# Allegro board XR872ET_REF1_SAMPLE_V1_0-20191008.brd
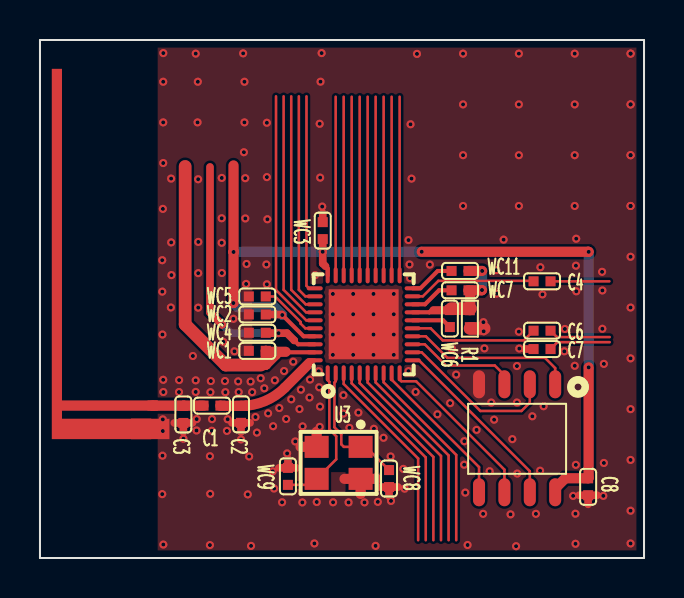
[diagram p0: board, top side]
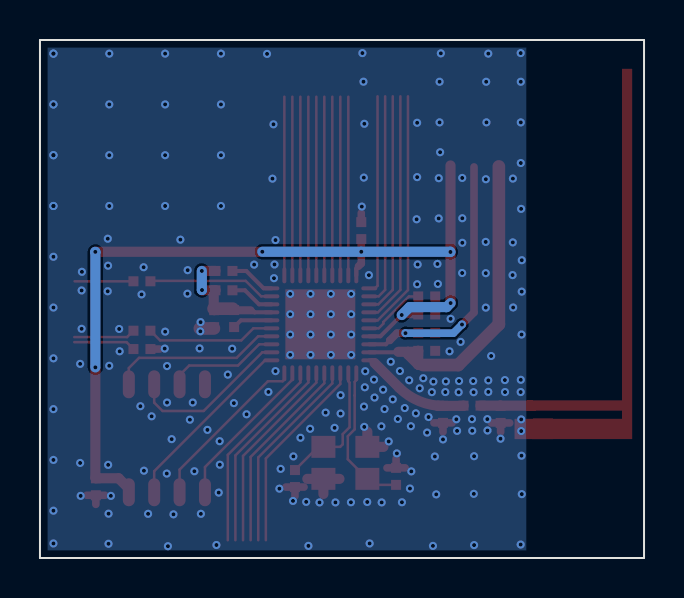
[diagram p1: board, bottom side, seen from below]

Outline 30.23 x 25.91 mm; copper layers: TOP, BOTTOM. Coordinates in mm from the lower left corner of the outline.
Outline path: rectangle 0,0 30.23,25.91

## Placement (name value [footprint] x y rotation side)
C1  0R  [C0402]  8.61 7.62 180 top
C2  NC  [C0402]  10.06 7.18 90 top
C3  NC  [C0402]  7.17 7.18 90 top
C4  104  [C0402]  25.12 13.84 180 top
C6  104  [C0402]  25.12 11.37 180 top
C7  104  [C0402]  25.12 10.45 180 top
C8  NC-104  [C0402]  27.43 3.56 90 top
JW1  ANT-F  [ANT2B18_54X5_30]  5.64 7.62 90 top
R1  0R  [R0402]  21.51 11.97 90 top
U1  XR872ET  [QFN40P0_40B5_00X5_00]  16.2 11.69 90 top
U3  40MHz-E3SB40MHz  [CRY-TSX3225]  14.94 4.76 270 top
U4  SPI_NOR_16Mb  [SOP8_150MIL]  23.87 5.96 270 top
WC1  1uF  [C0402]  10.87 10.36 180 top
WC2  1uF  [C0402]  10.87 12.18 180 top
WC3  NC-1uF  [C0402]  14.15 16.37 90 top
WC4  1uF  [C0402]  10.87 11.26 180 top
WC5  1uF  [C0402]  10.87 13.08 0 top
WC6  0.47uF  [C0402]  20.51 11.98 270 top
WC7  0.47uF  [C0402]  21.02 13.39 180 top
WC8  10pF  [C0402]  17.47 3.97 270 top
WC9  10pF  [C0402]  12.41 4.08 270 top
WC11  1uF  [C0402]  21.02 14.36 180 top

## Library data of the parts
C1-C4 C6 C7 WC1-WC8 WC11 = CAPACITOR
C8 WC9 = CAPACITOR_0
JW1 = ANT-F_1
R1 = R1 0805
U1 = XR872ET_10
U3 = Crystal4Pin_0
U4 = SPI-NOR-SO8

## Footprints (pads in the part's own frame, mm; a bottom-side part is the same pattern mirrored in y, then rotated)
ANT2B18_54X5_30
  rect 1.016x1.016 smd: 1(-1.168,0.577)
  rect 0.508x0.508 smd: 2(0,0)
C0402
  rect 0.5x0.5 smd: 1(-0.425,0) 2(0.425,0)
CRY-TSX3225
  rect 1.1x1.2 smd: 1(-0.8,1.1) 2(-0.8,-1.1) 3(0.8,-1.1) 4(0.8,1.1)
QFN40P0_40B5_00X5_00
  oval 0.8x0.2 smd: 1(-2.45,1.8) 2(-2.45,1.4) 3(-2.45,1) 4(-2.45,0.6) 5(-2.45,0.2) 6(-2.45,-0.2) 7(-2.45,-0.6) 8(-2.45,-1) 9(-2.45,-1.4) 10(-2.45,-1.8) 21(2.45,-1.8) 22(2.45,-1.4) 23(2.45,-1) 24(2.45,-0.6) 25(2.45,-0.2) 26(2.45,0.2) 27(2.45,0.6) 28(2.45,1) 29(2.45,1.4) 30(2.45,1.8)
  oval 0.2x0.8 smd: 11(-1.8,-2.45) 12(-1.4,-2.45) 13(-1,-2.45) 14(-0.6,-2.45) 15(-0.2,-2.45) 16(0.2,-2.45) 17(0.6,-2.45) 18(1,-2.45) 19(1.4,-2.45) 20(1.8,-2.45) 31(1.8,2.45) 32(1.4,2.45) 33(1,2.45) 34(0.6,2.45) 35(0.2,2.45) 36(-0.2,2.45) 37(-0.6,2.45) 38(-1,2.45) 39(-1.4,2.45) 40(-1.8,2.45)
  rect 3.5x3.5 smd: 41(0,0)
R0402
  rect 0.5x0.5 smd: 1(-0.425,0) 2(0.425,0)
SOP8_150MIL
  oval 1.4x0.6 smd: 1(-2.725,1.905) 2(-2.725,0.635) 3(-2.725,-0.635) 4(-2.725,-1.905) 5(2.675,-1.905) 6(2.675,-0.635) 7(2.675,0.635) 8(2.675,1.905)

## Nets
AVDD: U1.20(AVDD) WC11.2
GND: C2.1 C3.1 C7.2 C8.1 JW1.1(A) R1.1 U1.41(EPAD) U3.2 U3.4(5) U4.4(VSS) WC1.2 WC2.2 WC3.2 WC4.2 WC5.1 WC8.2 WC9.1
VCC-BAT: U1.39(VBAT) WC1.1
VDD-ANA: U1.38(VDD_ANA) WC4.1
VDD-EXT: C8.2 U1.30(VDDIO) U1.37(VDD_EXT) U4.8(VCC) WC2.1 WC3.1
ANT: C1.2 C3.2 JW1.2(G)
CHIP-PWD: U1.35(CHIP_PWD)
HXTAL1: U1.2(HXTAL1) U3.1 WC8.1
HXTAL2: U1.1(HXTAL2) U3.3 WC9.2
LOUTP: C6.2 U1.15(LOUTP)
MICP: C4.2 U1.19(MICP)
PA0: U1.5(PA0/SPI1_MOSI/SD_CMD/TWI1_SCL/C)
PA1: U1.6(PA1/SPI1_MISO/SD_DATA0/TWI1_SDA)
PA2: U1.7(PA2/SPI1_CLK/SD_CLK/UART0_TX/CS)
PA3: U1.8(PA3/SPI1_CS0/SD_DATA1/UART0_RX/)
PA4: U1.29(PA4/WUPIO0/UART1_RTS/SD_DATA2/T)
PA5: U1.28(PA5/WUPIO1/UART1_CTS/SD_DATA3/T)
PA6: U1.27(PA6/WUPIO2/UART1_RX/SPI1_CS1/TW)
PA7: U1.26(PA7/WUPIO3/UART1_TX/SPI1_CS2/TW)
PA8: U1.34(PA8/FEM_CTRL1/PWM0/TWI1_SCL/CSI)
PA9: U1.33(PA9/FEM_CTRL2/PWM1/TWI1_SDA/CSI)
PA10: U1.32(PA10/ADC_CH0/PWM2/CSI_HSYNC/EIN)
PA11: U1.31(PA11/ADC_CH1/PWM3/CSI_VSYNC/EIN)
PA19: U1.25(PA19/WUPIO5/UART2_RTS/TWI0_SCL/)
PA20: U1.24(PA20/WUPIO6/UART2_CTS/TWI0_SDA/)
PA21: U1.23(PA21/WUPIO7/UART2_RX/PWM2/SPI1_)
PA22: U1.22(PA22/WUPIO8/UART2_TX/PWM3/SPI1_)
PA23: U1.21(PA23/WUPIO9/TEST/EXT_DCDC_PUP/F)
PB2: U1.13(PB2/SWD_TMS/JTAG_TDO/PWM6/FLASH) U4.3(WP#)
PB3: U1.11(PB3/SWD_TCK/JTAG_TDI/PWM7/FLASH) U4.7(HOLD#)
RF: C1.1 C2.2 U1.40(ANT)
SPI0-CLK: U1.10(PB7/SPI0_CLK/SD_CLK/UART1_RTS/F) U4.6(CLK)
SPI0-CS: U1.14(PB6/SPI0_CS0///UART1_CTS/FLASH_) U4.1(CS#)
SPI0-MISO: U1.12(PB5/SPI0_MISO/SD_DATA0/UART1_RX) U4.2(MISO)
SPI0-MOSI: U1.9(PB4/SPI0_MOSI/SD_CMD/UART1_TX/F) U4.5(MOSI)
UART0-RX: U1.4(PB1/UART0_RX/JTAG_TCK/PWM5/SWD_)
UART0-TX: U1.3(PB0/UART0_TX/JTAG_TMS/PWM4/SWD_)
N17215532: U1.16(VRA2) WC6.2
N17215554: U1.18(VRA1) WC7.2
N17215555: R1.2 U1.17(AGND) WC6.1 WC7.1 WC11.1
N17215561: U1.36(VDD_DIG) WC5.2
N17215599: C4.1
N17215602: C7.1
N17215603: C6.1

## Via types
v1: diameter 0.406, hole 0.203, TOP to BOTTOM, 235 vias

## Routing (per net, layer and track width the routed paths; a pad name or vN(x,y) marks a point on that pad's centre or on a via; arc(x,y) is an arc through that point)
AVDD: length 2.3
  TOP w0.203: U1.20 19.03,13.49 19.9,14.36 WC11.2
GND: length 12.9
  TOP w0.203: 21.52,11.48 21.51,11.49 R1.1
  TOP w0.381: 10.06,6.31 C2.1 ; C2.1 10.51,6.76 ; C2.1 9.61,6.76 ; R1.1 21.96,11.54 ; WC9.1 12.41,4.96 ; WC9.1 11.95,4.51 ; WC9.1 12.86,4.51 ; 7.17,6.3 C3.1 ; C3.1 7.63,6.75 ; C3.1 6.72,6.75 ; WC3.2 14.15,17.25 ; WC8.2 17.92,3.55 ; WC8.2 17.01,3.55 ; WC8.2 17.47,3.09 ; 24.24,10.45 C7.2 ; 26.97,3.14 C8.1 ; C8.1 27.88,3.14 ; C8.1 27.43,2.68
  TOP w0.508: U3.4 16.85,3.96 ; U3.4 15.24,3.96 ; U3.4 16.04,3.2 ; 13.04,5.56 U3.2 13.84,6.31
  TOP w0.635: 22.23,11.48 21.52,11.48
  vias: v1(6.12,14.89) v1(6.12,13.32) v1(6.13,11.18) v1(6.15,6.93) v1(6.15,6.35) v1(6.13,5.12) v1(6.12,3.2) v1(6.17,25.25) v1(6.17,23.82) v1(6.17,21.79) v1(6.17,19.76) v1(6.15,17.46) v1(6.17,8.91) v1(6.17,8.3) v1(6.17,0.67) v1(6.55,12.53) v1(6.56,18.98) v1(6.57,15.79) v1(6.58,14.15) v1(6.96,8.9) v1(6.96,8.3) v1(7.18,5.97) v1(7.65,10.1) v1(7.79,25.23) v1(7.79,8.89) v1(7.79,8.31) v1(7.84,6.95) v1(7.83,6.38) v1(7.9,23.82) v1(7.89,21.79) v1(7.91,18.94) v1(7.92,15.81) v1(7.92,14.25) v1(7.92,12.52) v1(8.55,8.85) v1(8.53,8.29) v1(8.5,5.09) v1(8.52,3.21) v1(8.5,0.65) v1(8.61,6.95) v1(8.6,6.36) v1(9.1,19.01) v1(9.09,16.99) v1(9.09,15.77) v1(9.1,14.25) v1(9.18,10.81) v1(9.26,8.85) v1(9.28,8.29) v1(9.39,6.94) v1(9.35,6.36) v1(9.68,11.96) v1(9.73,10.34) v1(9.92,8.83) v1(9.94,8.3) v1(10.06,5.93) v1(10.17,25.24) v1(10.23,23.82) v1(10.23,21.79) v1(10.2,20.3) v1(10.27,19) v1(10.27,16.98) v1(10.34,14.71) v1(10.32,13.71) v1(10.4,3.18) v1(10.54,8.82) v1(10.47,5.08) v1(10.62,8.3) v1(10.56,0.61) v1(10.78,7.05) v1(10.86,6.27) v1(11.05,8.99) v1(11.22,8.49) v1(11.33,14.68) v1(11.35,21.77) v1(11.35,19.05) v1(11.38,16.94) v1(11.35,13.69) v1(11.42,7.24) v1(11.64,4.33) v1(11.67,6.59) v1(11.71,3.48) v1(11.75,8.89) v1(11.97,7.5) v1(12.11,2.79) v1(12.21,9.35) v1(12.32,6.95) v1(12.37,5.23) v1(12.57,7.94) v1(12.67,9.82) v1(12.77,5.83) v1(12.99,7.45) v1(13.06,8.42) v1(13.14,6.59) v1(13.13,2.78) v1(13.51,8.92) v1(13.49,8.02) v1(13.73,0.73) v1(13.77,14.15) v1(13.85,2.8) v1(13.95,9.34) v1(14.04,23.82) v1(14,21.72) v1(14.02,19.02) v1(13.97,8.54) v1(14.01,7.57) v1(14,6.56) v1(14.09,25.25) v1(14.12,17.58) v1(14.66,13.21) v1(14.66,12.19) v1(14.66,11.18) v1(14.66,10.16) v1(14.67,2.79) v1(15.18,8.14) v1(15.18,7.23) v1(15.44,2.78) v1(15.48,6.51) v1(15.67,13.21) v1(15.67,12.19) v1(15.67,11.18) v1(15.67,10.16) v1(15.93,7.27) v1(16.24,2.78) v1(16.69,13.21) v1(16.69,12.19) v1(16.69,11.18) v1(16.69,10.16) v1(16.71,6.46) v1(16.79,0.61) v1(16.91,2.81) v1(17.19,6.01) v1(17.55,5.08) v1(17.57,2.86) v1(17.7,13.21) v1(17.7,12.19) v1(17.7,11.18) v1(17.7,10.16) v1(18.18,4.46) v1(18.25,3.47) v1(18.44,15.9) v1(18.44,9.35) v1(18.54,21.69) v1(18.49,14.68) v1(18.52,14) v1(18.59,18.97) v1(18.8,8.31) v1(18.86,25.21) v1(19.51,14.67) v1(19.89,7.19) v1(20.52,7.75) v1(20.61,10.47) v1(20.83,9.17) v1(21.17,25.23) v1(21.17,22.69) v1(21.17,20.15) v1(21.17,17.61) v1(21.23,5.84) v1(21.23,4.67) v1(21.28,3.27) v1(21.4,0.65) v1(21.85,6.41) v1(22.19,11.8) v1(22.2,11.34) v1(22.24,10.48) v1(22.17,2.21) v1(22.5,4.34) v1(22.58,7.78) v1(22.72,6.92) v1(22.84,14.4) v1(22.85,13.22) v1(23.2,15.92) v1(23.55,2.18) v1(23.64,5.95) v1(23.82,0.59) v1(23.87,9.6) v1(23.87,7.78) v1(23.88,4.22) v1(23.96,25.23) v1(23.96,22.69) v1(23.96,20.15) v1(23.96,17.61) v1(23.96,11.32) v1(23.98,10.48) v1(24.64,7.09) v1(24.82,2.21) v1(25.04,14.54) v1(25.02,4.37) v1(25.14,13.18) v1(25.2,7.59) v1(26.24,10.34) v1(26.26,11.46) v1(26.68,3.11) v1(26.76,25.23) v1(26.76,22.69) v1(26.76,20.15) v1(26.76,17.61) v1(26.83,15.97) v1(26.82,14.62) v1(26.84,13.34) v1(26.76,9.61) v1(26.81,4.66) v1(26.79,2.22) v1(26.8,0.71) v1(28.13,14.31) v1(28.14,13.38) v1(28.14,11.46) v1(28.22,9.71) v1(28.22,4.75) v1(28.19,3.11) v1(29.55,25.23) v1(29.55,25.23) v1(29.55,22.69) v1(29.55,22.69) v1(29.55,20.15) v1(29.55,20.15) v1(29.55,17.61) v1(29.55,17.61) v1(29.55,15.07) v1(29.55,12.53) v1(29.55,9.99) v1(29.55,7.45) v1(29.55,4.91) v1(29.55,2.37) v1(29.55,0.73)
VCC-BAT: length 16.8
  TOP w0.203: 12.29,10.31 12.32,10.29 U1.39
  TOP w0.508: 12.29,10.31 11.81,10.31 ; 11.81,10.31 11.35,10.31 WC1.1 11.3,9.67 ; 11.81,10.31 11.81,10.18 11.3,9.67 11.3,9.67 ; 11.3,9.67 11.08,9.67 11.06,9.65
  TOP w0.635: 7.26,19.58 7.26,11.68 9.3,9.65 11.06,9.65
VDD-ANA: length 13.8
  TOP w0.203: U1.38 12.92,10.69 12.72,10.88
  TOP w0.381: 8.51,19.56 8.51,12.28 v1(9.11,11.68) ; 12.72,10.88 12.72,10.89 12.36,11.25 v1(11.94,11.25) 11.32,11.25 WC4.1
  BOTTOM w0.381: v1(11.94,11.25) 9.54,11.25 v1(9.11,11.68)
VDD-EXT: length 45.6
  TOP w0.203: 14.29,14.59 14.4,14.48 U1.30 ; U1.37 13.19,11.09 v1(12.13,12.15)
  TOP w0.381: WC3.1 v1(14.15,15.32) 14.15,14.73 14.29,14.59 ; WC2.1 12.1,12.18 v1(12.13,12.15)
  TOP w0.508: v1(19.1,15.32) 27.43,15.32 27.43,15.31 v1(27.46,15.31) ; v1(9.69,15.31) 9.69,15.31 ; 9.69,15.31 9.68,15.31 9.68,19.63 ; 9.69,15.31 9.69,12.76 v1(9.68,12.75) ; v1(27.45,9.53) 27.45,4.01 C8.2 26.29,3.99 25.78,3.48 U4.8
  BOTTOM w0.508: v1(9.68,12.75) 9.88,12.55 11.73,12.55 v1(12.13,12.15) ; v1(9.69,15.31) 9.7,15.32 v1(14.15,15.32) v1(19.1,15.32) ; v1(27.46,15.31) 27.46,15.3 27.45,15.3 v1(27.45,9.53)
ANT: length 2.6
  TOP w0.508: C1.2 7.19,7.62 ; 7.19,7.62 C3.2 ; 7.19,7.62 5.64,7.62 JW1.2
CHIP-PWD: length 12.3
  TOP w0.127: 11.81,23.09 11.81,13.4 13.32,11.89 U1.35
HXTAL1: length 6.6
  TOP w0.127: WC8.1 16.31,5.56 U3.1 15.2,5.56 15.08,5.69 15.08,6.19 14.73,6.54 14.73,8.78 14.8,8.84 U1.2
HXTAL2: length 7.4
  TOP w0.127: WC9.2 13.54,3.66 U3.3 14.82,4.94 14.82,6.09 14.48,6.43 14.48,8.13 14.48,8.13 14.48,8.81 14.4,8.89 U1.1
LOUTP: length 6.5
  TOP w0.127: C6.2 24.21,10.88 20.15,10.88 19.55,11.49 U1.15
MICP: length 6.4
  TOP w0.127: U1.19 19.16,13.09 19.93,13.86 24.68,13.86 C4.2
PA0: length 9.9
  TOP w0.127: 19.68,0.89 19.68,5.05 16,8.74 U1.5
PA1: length 9.9
  TOP w0.127: U1.6 16.4,8.77 20.07,5.11 20.07,0.89
PA2: length 9.9
  TOP w0.127: U1.7 16.8,8.78 20.45,5.13 20.45,0.89
PA3: length 9.9
  TOP w0.127: 20.83,0.89 20.83,5.16 17.2,8.79 U1.8
PA4: length 8.9
  TOP w0.127: 14.8,23.07 U1.29
PA5: length 8.9
  TOP w0.127: U1.28 15.2,23.07
PA6: length 8.9
  TOP w0.127: U1.27 15.6,23.07
PA7: length 8.9
  TOP w0.127: U1.26 16,23.07
PA8: length 11.7
  TOP w0.127: 12.19,23.09 12.19,13.41 13.32,12.29 U1.34
PA9: length 11.2
  TOP w0.127: 12.57,23.09 12.57,13.41 13.3,12.69 U1.33
PA10: length 10.6
  TOP w0.127: U1.32 13.28,13.09 12.95,13.41 12.95,23.09
PA11: length 9.9
  TOP w0.127: 13.34,23.09 13.34,13.61 13.46,13.49 U1.31
PA19: length 8.9
  TOP w0.127: U1.25 16.4,23.07
PA20: length 8.9
  TOP w0.127: U1.24 16.8,23.07
PA21: length 8.9
  TOP w0.127: U1.23 17.2,23.07
PA22: length 8.9
  TOP w0.127: U1.22 17.6,23.07
PA23: length 8.9
  TOP w0.127: U1.21 18,23.07
PB2: length 5.7
  TOP w0.127: U4.3 23.24,9.15 22.76,9.63 20.32,9.63 19.26,10.69 U1.13
PB3: length 9.2
  TOP w0.127: U1.11 18.96,9.89 24.51,4.34 U4.7
RF: length 5.8
  TOP w0.203: 13.48,9.75 13.62,9.89 U1.40
  TOP w0.508: 10.3,7.62 10.31,7.61 C2.2 ; C1.1 9.04,7.61 C2.2 ; 13.48,9.75 12.25,8.52 arc(11.24,7.84) C2.2
SPI0-CLK: length 8.6
  TOP w0.127: U4.6 23.24,4.42 18.82,8.84 18.08,8.84 18,8.93 U1.10
SPI0-CS: length 8.6
  TOP w0.127: U1.14 19.31,11.09 20.39,10.01 25.27,10.01 25.78,9.5 U4.1
SPI0-MISO: length 8.2
  TOP w0.127: U1.12 19.1,10.29 22.03,7.35 24.09,7.35 24.51,7.77 U4.2
SPI0-MOSI: length 7.8
  TOP w0.127: U1.9 17.6,8.92 21.97,4.55 U4.5
UART0-RX: length 9.9
  TOP w0.127: 19.3,0.89 19.3,5.03 15.6,8.74 U1.4
UART0-TX: length 9.9
  TOP w0.127: 18.92,0.89 18.92,4.98 15.2,8.7 U1.3
N17215532: length 2
  TOP w0.203: WC6.2 20.17,11.89 U1.16
N17215554: length 2.2
  TOP w0.203: U1.18 19.27,12.69 19.97,13.39 WC7.2
N17215555: length 7.4
  TOP w0.203: 19.48,12.29 20.4,12.29 WC6.1 20.58,12.47 ; 19.48,12.29 U1.17 ; 19.48,12.29 19.59,12.4 19.68,12.4 ; 21.53,12.46 21.54,12.47
  TOP w0.381: 19.68,12.4 WC6.1
  TOP w0.508: v1(22.12,13.4) 22.11,13.39 WC7.1 21.53,13.3 21.53,12.46 21.51,12.44 R1.2 ; WC11.1 v1(22.13,14.36)
  TOP w0.635: 21.54,12.47 20.58,12.47
  BOTTOM w0.508: v1(22.12,13.4) 22.13,13.41 v1(22.13,14.36)
N17215561: length 3.2
  TOP w0.127: U1.36 13.62,11.49 13.28,11.49 13.04,11.72 13.04,11.8 11.77,13.08 WC5.2
N17215599: length 2.9
  TOP w0.127: C4.1 28.49,13.84
N17215602: length 3.1
  TOP w0.127: C7.1 25.89,10.79 28.51,10.79
N17215603: length 3.1
  TOP w0.127: 28.51,11.05 25.87,11.05 C6.1

## Copper pours and planes (outline as drawn; the poured copper is in the pictures)
GND on TOP (solid shape): 6.48,5.95 4.57,5.95 4.57,6.96 6.48,6.96
GND on TOP: 0.38,0.38 0.38,25.53 29.84,25.53 29.84,0.38 ; 1 cut-out
GND on BOTTOM: 0.38,0.38 0.38,25.53 29.84,25.53 29.84,0.38
Net_46 on TOP (solid shape): 1.1,7.88 5.89,7.88 5.89,7.37 1.1,7.37 1.1,6.96 5.57,6.96 5.57,5.95 0.59,5.95 0.59,24.46 1.1,24.46

## Text on the board
DISPLAY_TOP: FIGURE | SIZE | 7.99 | 19.69 | DRILL CHART: TOP to BOTTOM | ALL UNITS ARE IN MILS | PLATED | QTY | 244 | 44
